# Altium PCB PCB.PcbDoc
Units mil, origin at the board's own origin, x right, y up, seen from the top; angles counter-clockwise.
Board outline 2700 x 2100 mil, 2 copper layers (Top Layer, Bottom Layer); 40 components, 50 nets, 179 pads, 62 vias.
Unrouted connection lines stored in the file: 1.
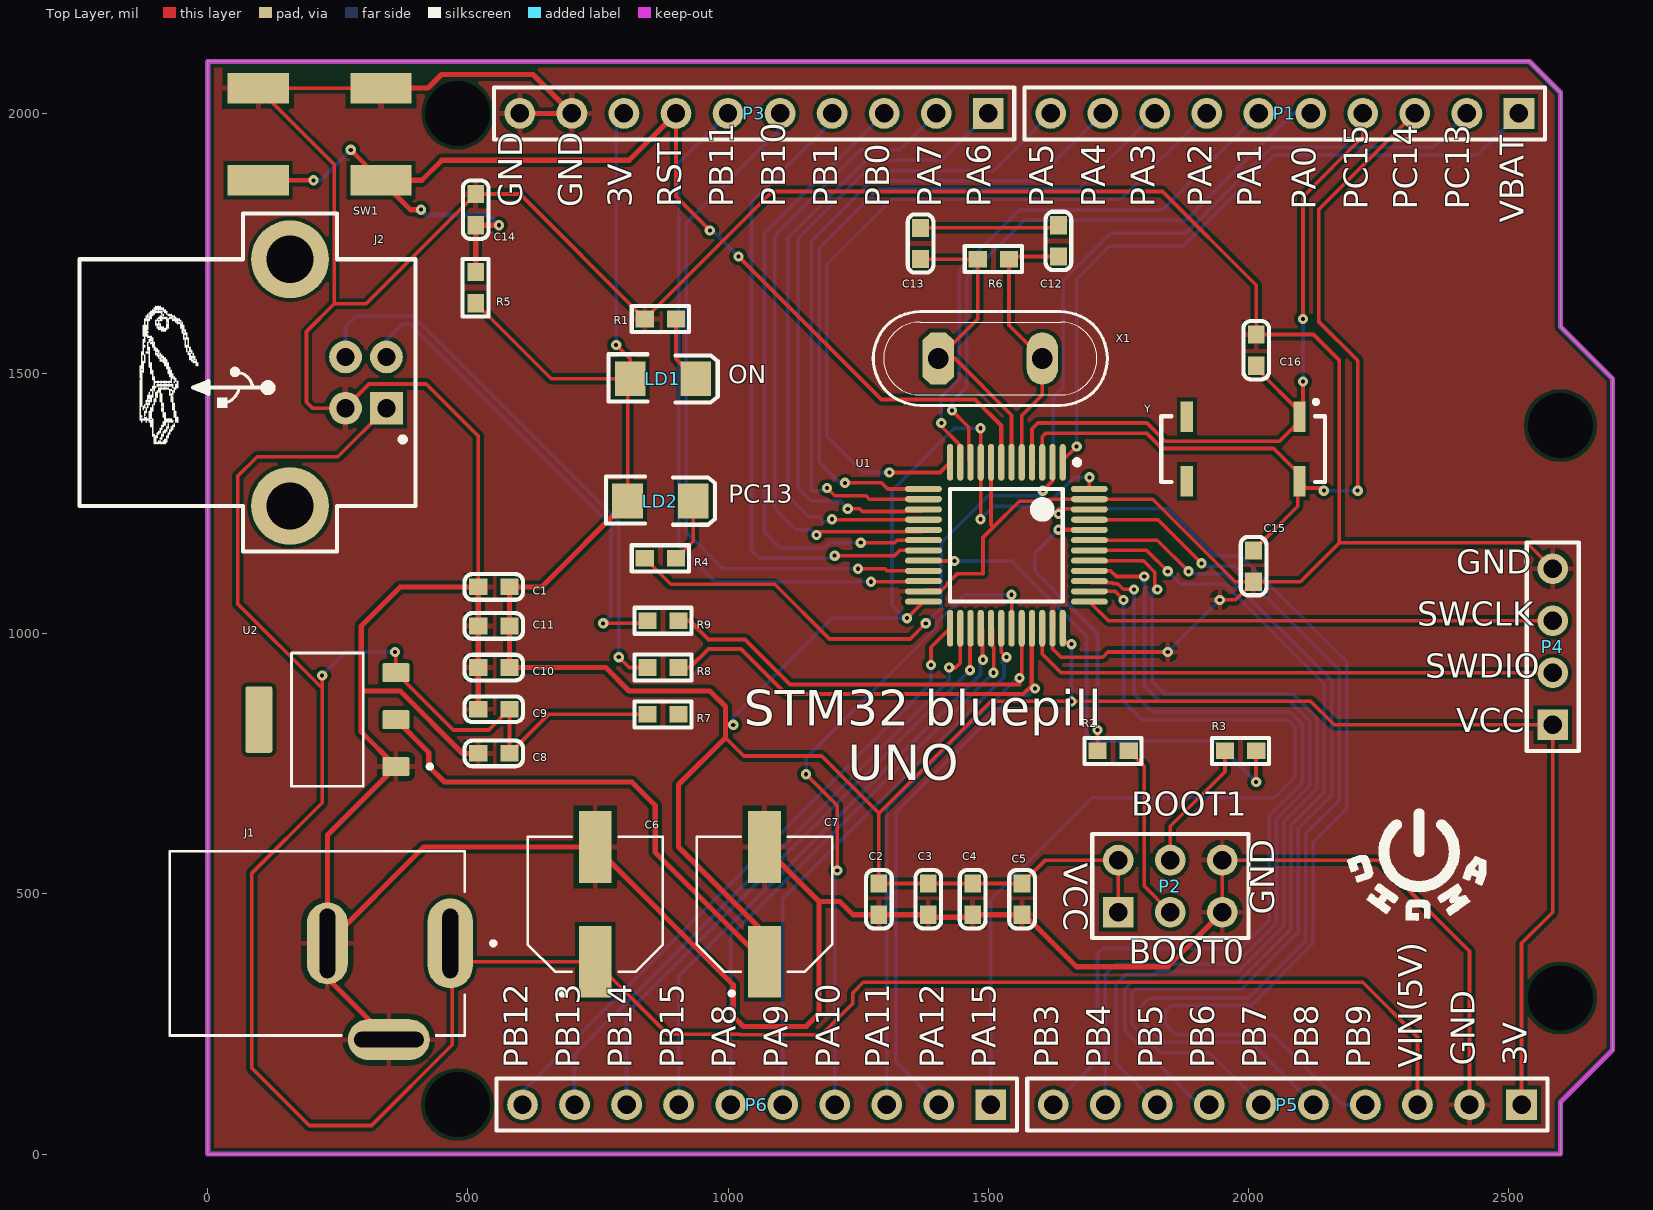
[diagram p0: Top Layer view]
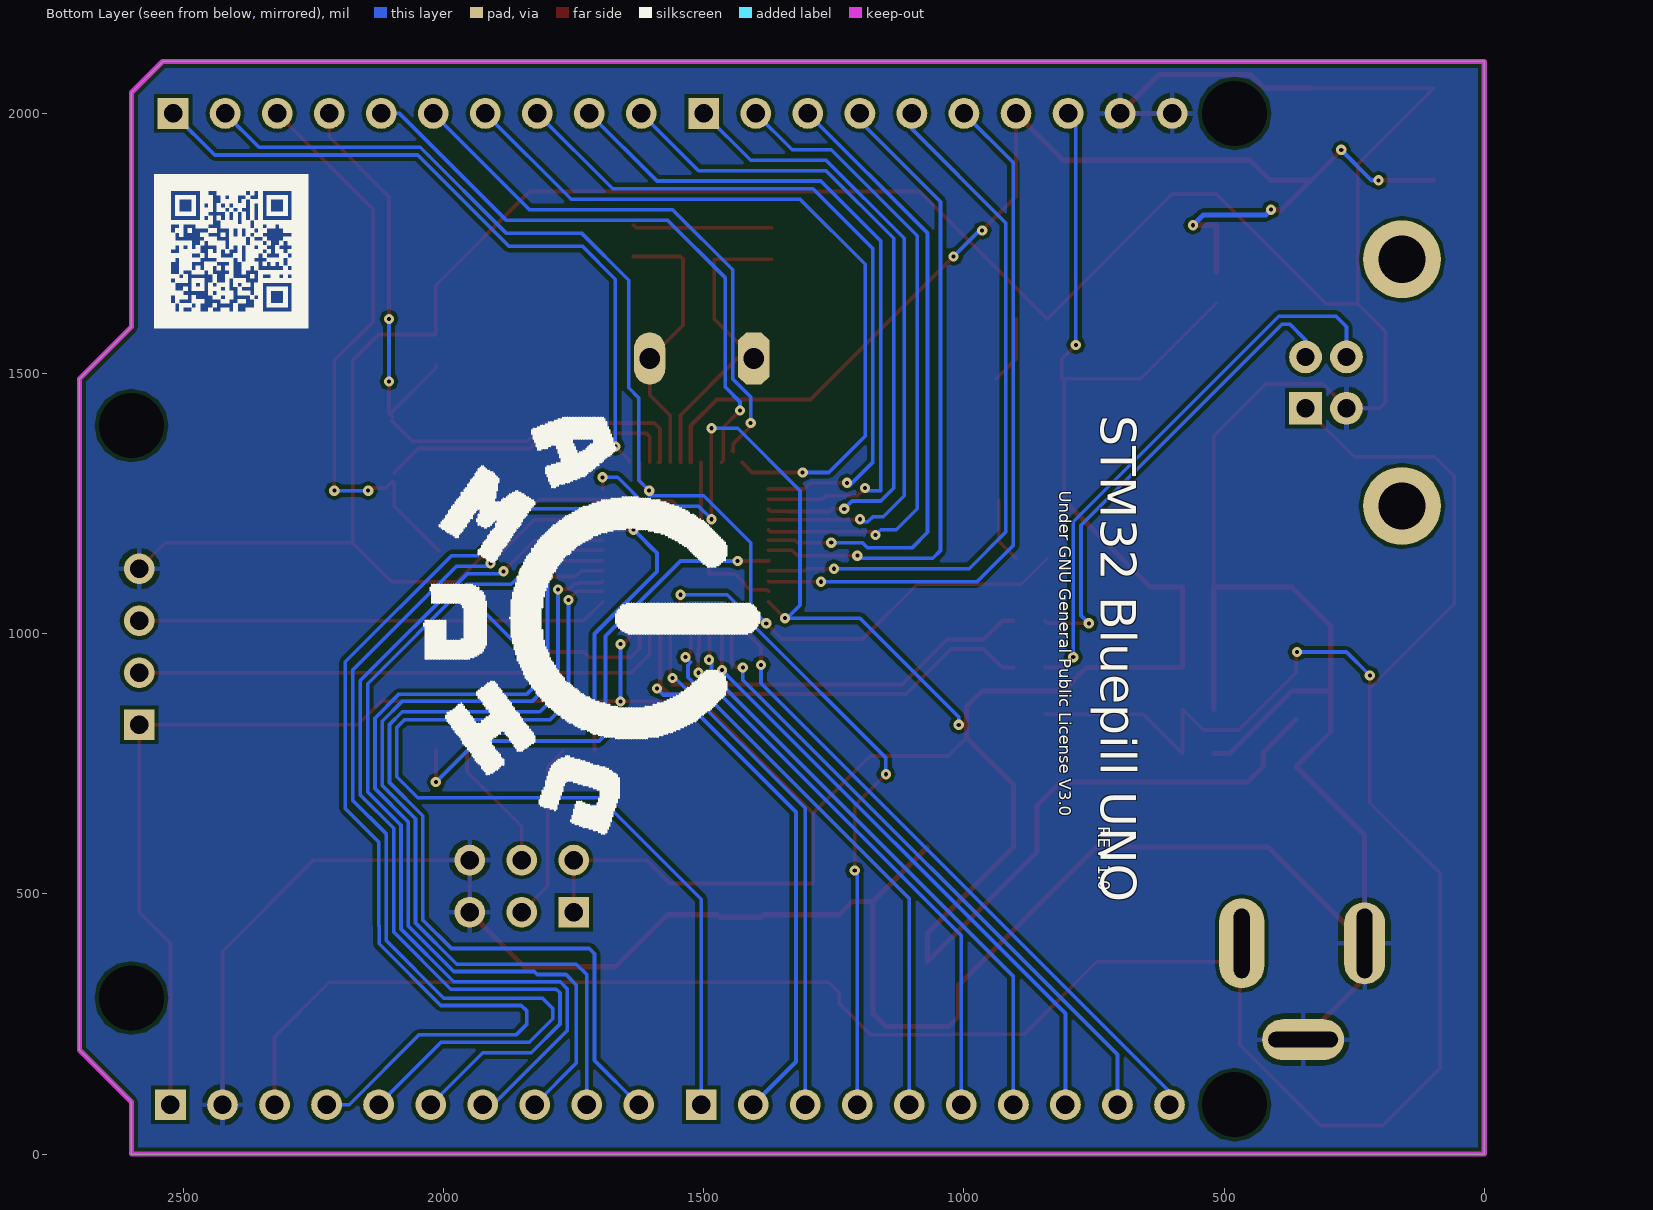
[diagram p1: Bottom Layer view, seen from below]
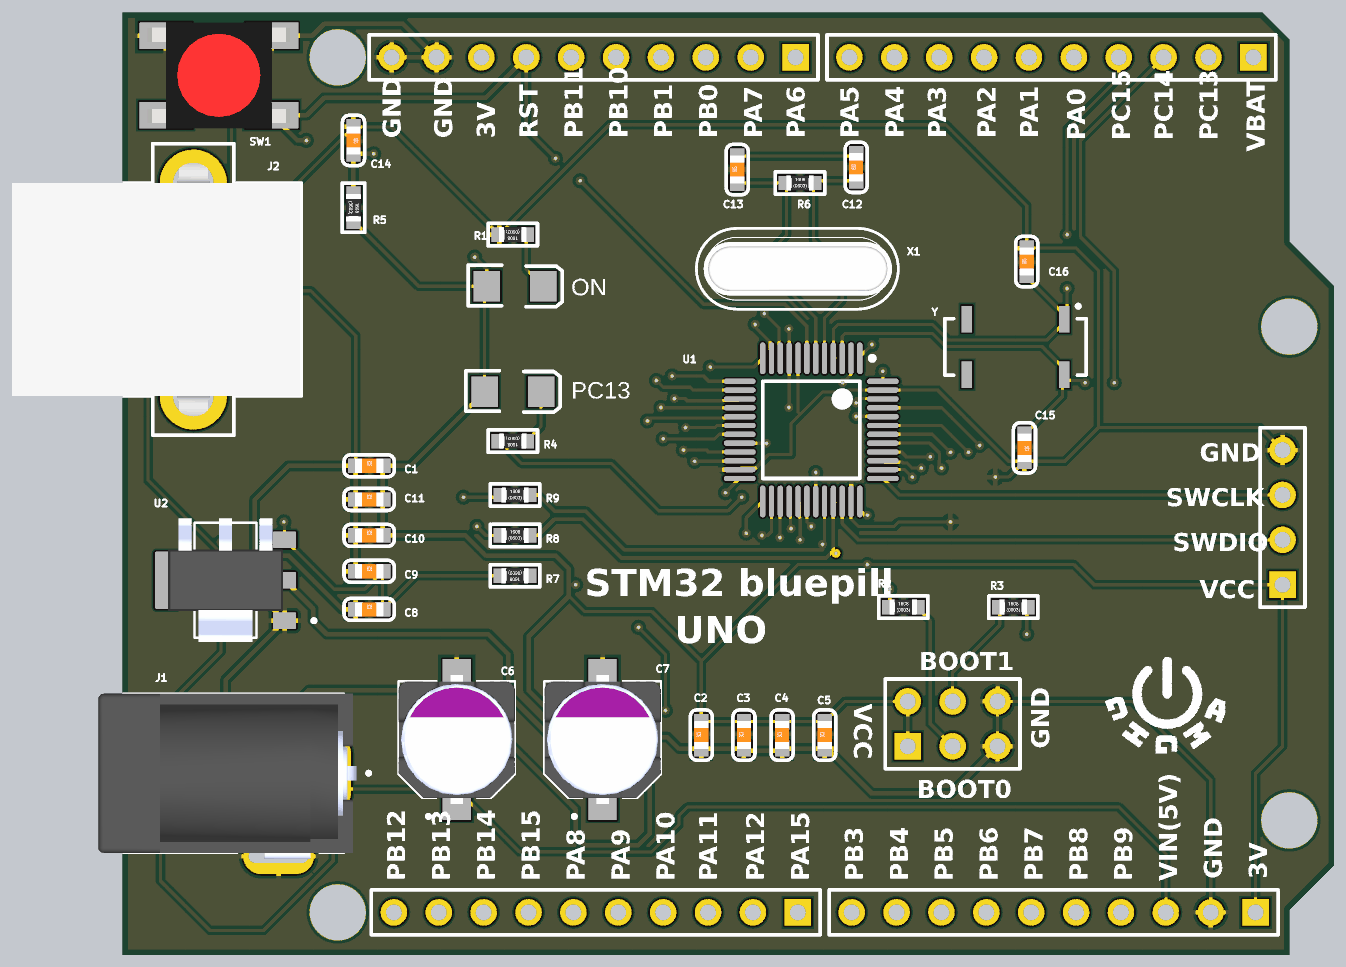
[diagram p2: 3D render of the assembled board from above, using the file's embedded part models]

## Layer stack, top to bottom
Top Solder: solder mask 0.4, Solder Resist, Dk 3.5
Top Layer: signal copper 1.4
Dielectric 1: dielectric 12.6, FR-4, Dk 4.8
Bottom Layer: signal copper 1.4
Bottom Solder: solder mask 0.4, Solder Resist, Dk 3.5

## Board outline
0,0 0,2100 2540,2100 2600,2040 2600,1590 2700,1490 2700,200 2600,100 2600,0

## Design rules (kind name [scope] priority, off if disabled: settings)
Clearance [All] p1: gap=7
DiffPairsRouting [All] p1: maxlimit=10 minlimit=10 mostfreqgap=10 toplayer_minwidth=8 toplayer_maxwidth=15 toplayer_prefwidth=15 bottomlayer_minwidth=8 bottomlayer_maxwidth=15 bottomlayer_prefwidth=15 maxuncoupledlength=500
PolygonConnect [All] p1: connectstyle=Relief reliefconductorwidth=10 reliefentries=4 polygonreliefangle="90 Angle" airgapwidth=10
RoutingVias [All] p1: holewidth=7.87 width=19.68 viastyle="Through Hole" minholewidth=7.87 minwidth=19.68 maxholewidth=7.87 maxwidth=19.68
SolderMaskExpansion [All] p1: expansion=4
UnpouredPolygon [All] p1: allowunpoured=FALSE
Width [All] p1: maxlimit=10 minlimit=7 preferedwidth=7
28 further rules are at their usual default settings.

## Classes and differential pairs
differential pair USB: +USB_P -USB_N

## Components (designator, comment, footprint, x,y, rotation, side; value= is the part's Value field where it differs from the comment)
C1 "Capacitor SMD" "0603 Capacitor" 550,1090 r0 top
C2 "Capacitor SMD" "0603 Capacitor" 1290,490 r90 top
C3 "Capacitor SMD" "0603 Capacitor" 1385,490 r90 top
C4 "Capacitor SMD" "0603 Capacitor" 1470,490 r90 top
C5 "Capacitor SMD" "0603 Capacitor" 1565,490 r90 top
C6 "100uF" CAP_50SVF10M 745,480 r90 top
C7 "100uF" CAP_50SVF10M 1070,480 r90 top
C8 "Capacitor SMD" "0603 Capacitor" 550,770 r0 top
C9 "Capacitor SMD" "0603 Capacitor" 550,855 r0 top
C10 "Capacitor SMD" "0603 Capacitor" 550,935 r0 top
C11 "Capacitor SMD" "0603 Capacitor" 550,1015 r0 top
C12 "Capacitor SMD" "0603 Capacitor" 1635,1755 r90 top
C13 "Capacitor SMD" "0603 Capacitor" 1370,1750 r90 top
C14 "Capacitor SMD" "0603 Capacitor" 515,1815 r270 top
C15 "Capacitor SMD" "0603 Capacitor" 2010,1130 r270 top
C16 "Capacitor SMD" "0603 Capacitor" 2015,1545 r90 top
J1 "DC-005-5A-2.0" XKB_DC-005-5A-2.0 230,405 r0 top
J2 "USBB" USB 90,1470 r90 top
LD1 "SMD LED" "LED_1206 RED" 875,1490 r0 top
LD2 "SMD LED" "LED_1206 RED" 870,1255 r0 top
P1 "Header 10" HDR1X10 2520,2000 r180 top
P2 "Header 3X2" HDR2X3 1750,465 r0 top
P3 "Header 10" HDR1X10 1500,2000 r180 top
P4 "Header 4" HDR1X4 2585,825 r90 top
P5 "Header 10" HDR1X10 2525,95 r180 top
P6 "Header 10" HDR1X10 1505,95 r180 top
R1 "Resistor SMD" "0603 Resistor" 870,1605 r180 top
R2 "Resistor SMD" "0603 Resistor" 1740,775 r0 top
R3 "Resistor SMD" "0603 Resistor" 1985,775 r0 top
R4 "Resistor SMD" "0603 Resistor" 870,1145 r180 top
R5 "Resistor SMD" "0603 Resistor" 515,1665 r270 top
R6 "Resistor SMD" "0603 Resistor" 1510,1720 r0 top
R7 "Resistor SMD" "0603 Resistor" 875,845 r180 top
R8 "Resistor SMD" "0603 Resistor" 875,935 r0 top
R9 "Resistor SMD" "0603 Resistor" 875,1025 r0 top
SW1 "LTL613" LTL613 215,1960 r180 top
U1 "STM32F103C8T6" LQFP48_N 1535,1170 r270 top
U2 "AMS1117-3.3" SOT229P700X180-4N 230,835 r180 top
X1 "8MHz" Xtal 1510,1520 r0 top
Y "32.7680K" OSCL550P800X320X254-4N 1990,1355 r270 top

## Footprints (in the part's own frame and the unit in brackets; to place one, negate y for a bottom-side part, rotate by r counter-clockwise, add the part's x,y. Pads: shape width x height; smd on the part's side, far side on the other; paste and mask are expansions set on the pad)
"0603 Capacitor" [mil]
  rect 35x32 smd: 1(-29.99,0.01) 2(30.01,0.01)
  silkscreen extent -56,-25 56,25, body extent -31,-16 32,16, height 12
"0603 Resistor" [mil]
  rect 35x32 smd: 1(-30,0) 2(30,0)
  silkscreen extent -55,-25 55,25, body extent -31,-17 31,17, height 18
CAP_50SVF10M [mm]
  rect 3.5x1.6 smd: 1(-2.8,0) 2(2.8,0)
  silkscreen extent -4.45,-3.3 3.3,3.3, body extent -3.65,-3.3 3.65,3.3, height 5.9
HDR1X4 [mm] "Connector; Header; 4 Position"
  rect 1.5x1.5 hole 0.9: 1(0,0)
  round 1.5 hole 0.9: 2(2.54,0) 3(5.08,0) 4(7.62,0)
  silkscreen extent -1.27,-1.27 8.89,1.27
HDR1X10 [mm] "Connector; Header; 10 Position"
  rect 1.5x1.5 hole 0.9: 1(0,0)
  round 1.5 hole 0.9: 2(2.54,0) 3(5.08,0) 4(7.62,0) 5(10.16,0) 6(12.7,0) 7(15.24,0) 8(17.78,0) 9(20.32,0) 10(22.86,0)
  silkscreen extent -1.27,-1.27 24.13,1.27
HDR2X3 [mm] "Connector; Header; 3x2 Position"
  rect 1.5x1.5 hole 0.9: 1(0,0)
  round 1.5 hole 0.9: 2(0,2.54) 3(2.54,0) 4(2.54,2.54) 5(5.08,0) 6(5.08,2.54)
  silkscreen extent -1.27,-1.27 6.35,3.81
"LED_1206 RED" [mm]
  rect 1.5x1.7 smd: 1(-1.6,0) 2(1.6,0)
  silkscreen extent -2.65,-1.15 2.67,1.2, body extent -1.6,-0.8 1.6,0.8, height 1.11
LQFP48_N [mm] "Thin QFP, 48-Leads, Body 7x7mm, Pitch 0.5mm, IPC Medium Density"
  oval 1.8x0.3 smd: 1(-4.05,2.75) 2(-4.05,2.25) 3(-4.05,1.75) 4(-4.05,1.25) 5(-4.05,0.75) 6(-4.05,0.25) 7(-4.05,-0.25) 8(-4.05,-0.75) 9(-4.05,-1.25) 10(-4.05,-1.75) 11(-4.05,-2.25) 12(-4.05,-2.75) 25(4.05,-2.75) 26(4.05,-2.25) 27(4.05,-1.75) 28(4.05,-1.25) 29(4.05,-0.75) 30(4.05,-0.25) 31(4.05,0.25) 32(4.05,0.75) 33(4.05,1.25) 34(4.05,1.75) 35(4.05,2.25) 36(4.05,2.75)
  oval 0.3x1.8 smd: 13(-2.75,-4.05) 14(-2.25,-4.05) 15(-1.75,-4.05) 16(-1.25,-4.05) 17(-0.75,-4.05) 18(-0.25,-4.05) 19(0.25,-4.05) 20(0.75,-4.05) 21(1.25,-4.05) 22(1.75,-4.05) 23(2.25,-4.05) 24(2.75,-4.05) 37(2.75,4.05) 38(2.25,4.05) 39(1.75,4.05) 40(1.25,4.05) 41(0.75,4.05) 42(0.25,4.05) 43(-0.25,4.05) 44(-0.75,4.05) 45(-1.25,4.05) 46(-1.75,4.05) 47(-2.25,4.05) 48(-2.75,4.05)
  silkscreen extent -4.17,-2.75 2.75,3.58, body extent -3.5,-3.5 3.5,3.5, height 1.6
LTL613 [mm]
  rect 3x1.5 smd: 0(-3,-2.25) 0(3,-2.25) 1(-3,2.25) 1(3,2.25)
  body extent -4.04,-3 4.04,3, height 5
OSCL550P800X320X254-4N [mm]
  rect 1.5x0.6 smd: 1(-1.575,2.75) 2(-1.575,-2.75) 3(1.575,-2.75) 4(1.575,2.75)
  silkscreen extent -2.4,-4 1.6,4
SOT229P700X180-4N [mm]
  rrect15% 1.31x0.93 smd: 1(-3.345,2.29) 2(-3.345,0) 3(-3.345,-2.29)
  rrect15% 1.31x3.24 smd: 4(3.345,0)
  silkscreen extent -5.1,-3.25 1.75,3.25, body extent -3.25,-3.5 3.25,3.5, height 1.8
USB [mm]
  rect 1.6x1.6 hole 0.9: 1(-0.928,-6.442)
  round 1.6 hole 0.9: 2(1.572,-6.442) 3(1.572,-4.442) 4(-0.928,-4.442)
  round 3.8 hole 2.3: 5(-5.698,-1.732) 6(6.342,-1.732)
  silkscreen extent -7.92,-7.85 8.58,8.55, body extent -7.83,-6.88 7.07,7.84, height 8.15
XKB_DC-005-5A-2.0 [mm]
  oval 2.2x4.4 hole 0.762 slot 3.4 at 90 deg: 1(6,0)
  oval 2x4 hole 0.762 slot 3.4 at 90 deg: 2(0,0)
  oval 4x2 hole 0.762 slot 3.4 at 0 deg: 3(3,-4.7)
  silkscreen extent -7.7,-4.5 8.2,4.5, body extent -7.2,-4.85 7.4,4.5, height 11
Xtal [mil]
  oct 60x100 hole 40: 1(-106,9)
  oval 60x100 hole 40: 2(94,9)
  silkscreen extent -231,-81 219,99, body extent -215,-51 205,69, height 161

## Part data
C6 C7: library part 50SVF10M, "10F 50V Aluminum - Polymer Capacitors Radial, Can - SMD 40mOhm 1000 Hrs @ 125C"
J1: "DC Power Receptacle Jack, Through Hole，Right Angle"
J2: "USB 1.1, Right Angle, Thru-Hole, Reverse Type, Receptacle, 4 Position, Black"
LD1 LD2: library part "LED SMD"
P1 P3 P5 P6: "Header, 10-Pin"
P2: "Header, 3-Pin, Dual row"
P4: "Header, 4-Pin"
SW1: library part Button_tact, "Tact button switch"
U1: "STM32 ARM-based 32-bit MCU Performance Line with 64 kB Flash, 20 kB Internal RAM, -40 to +85°C Temperature, 48-Pin LQFP, Tray"
U2: "Sot223/Pkg 1-Amp 3.3-Volt Low Drop Out Voltage Regulatator"
X1: library part Crystal
Y: library part MC-306_32.7680K-A5:_ROHS, "32.768kHz ±100ppm Crystal 12.5pF 50 kOhms 4-SOJ, 5.50mm pitch"

## Free pads (board coordinates)
  round 0 hole 125: 0(480,95) 0(480,2000) 0(2600,300) 0(2600,1400)

## Via types
v1: diameter 19.68, hole 7.87, Top Layer to Bottom Layer, tented both sides, 61 vias
v2: diameter 19.68, hole 7.87, Top Layer to Bottom Layer, 1 vias

## Nets (pads, with @x,y where several pads share a name; then routed paths per layer and width w, separated by ;. In a path a pad name is that pad's centre, name@x,y a point inside that pad or via, vN(x,y) a via of type N, cw(c..) or ccw(c..) an arc to the next point about the centre after c; other vN are vias at no path point)
5V: C6.1 C8.2 C9.2 J1.1 J2.1 P5.3 R7.2 U2.3 | length 5331.1
  Top Layer w7: v1(220,920) 220,895 ; J2.1 250.16,1340 95,1340 57.5,1302.5 57.5,1057.5 220,895 ; v1(360,965) 361.69,963.31 U2.3 471.85,815 540,815 C9.2 C8.2 655,845 R7.2 ; J1.1 501.46,369.76 C6.1 884.76,230 1023.08,230 1023.58,229.5 1179.5,229.5 1240,290 1240,310 1260,330 2220,330 2325,225 P5.3 ; J1.1@470,369.76 470,210 315,55 195,55 85,165 85,540 220,675 220,895
  Top Layer w10: J1.1@470,369.76 J1.1@501.46,369.76
  Bottom Layer w7: v1(220,920) 265,965 v1(360,965)
BOOT0: R2.1 U1.44 | length 553
  Top Layer w8: v1(1635,1200) 1693.98,1200 U1.44 ; R2.1 v1(1710,815)
  Bottom Layer w8: v1(1635,1200) 1623.75,1188.75 1601.25,1166.25 1590,1155 1590,1120 1710,1000 v1(1710,815)
BOOT1: R3.2 U1.20 | length 986.7
  Top Layer w8: U1.20 1376.02,1140 v1(1435,1140) ; v1(2015,715) R3.2
  Bottom Layer w8: v1(1435,1140) 1545,1140 1689.16,995.84 1689.16,806.37 1701.37,794.16 1935.84,794.16 v1(2015,715)
GND: C1.1 C2.1 C3.1 C4.1 C5.1 C6.2 C7.2 C8.1 C9.1 C10.1 C11.1 C14.1 C15.2 C16.2 J1.2 J1.3 J2.4 P2.5 P2.6 P3.9 P3.10 P4.4 P5.2 R1.2 SW1.0 U1.8 U1.23 U1.35 U1.47 U2.1 | length 12021.7
  Top Layer w7: SW1.0@333.11,2048.58 96.89,2048.58 243.48,1901.99 243.48,1634.37 ; C1.1 520.01,1379.99 420,1480 310,1480 264.87,1434.87 J2.4 201.55,1433.45 190,1445 190,1580.89 243.48,1634.37 ; U1.23 1378.83,1084.7 1411.87,1084.7 1421.48,1094.31 1421.48,1096.48 1440,1115 1490,1115 1490,1185 1510,1205 ; U1.8 1505.47,1209.53 1510,1205 ; U1.35 1623.58,971.42 1640,955 1720,955 1730,965 v1(1845,965) ; v1(1945,1065) 1975.01,1065 C15.2 ; P2.5 P2.6 2250,565 2425,390 P5.2 ; P4.4 2535,1175 2175,1175 ; 243.48,1634.37 304.38,1634.37 C14.1 600.01,1844.99 R1.2 1085,1850 1835,1850 2014.99,1670.01 C16.2 2124.99,1575.01 2175,1525 2175,1175 ; 1510,1205 1559.66,1254.66 1613.43,1254.66 1617.35,1258.58 U1.47 1816.42,1258.58 1975.01,1099.99 C15.2 ; C15.2 2099.99,1099.99 2175,1175
  Top Layer w10: SW1.0@333.11,2048.58 423.22,2048.58 449.14,2074.5 625.5,2074.5 P3.9 P3.10 ; J1.3 230,338.07 J1.2 ; C8.1 489.99,770.01 370,890 295,890 ; C9.1 C10.1 C11.1 C1.1 370.01,1090.01 295,1015 295,890 ; C7.2 1175,485.24 ; P2.5 1845,360 1670,360 1570,460 1475,460 1470,455 1390,455 C3.1 1240,460 1214.76,485.24 1175,485.24 ; J1.2 230,613.15 U2.1 295,811.54 295,890 ; J1.2 415.24,590.24 C6.2 1010,325.24 1010,265 1030,245 1150,245 1175,270 1175,485.24
  Bottom Layer w7: v1(1845,965) v1(1945,1065)
NetC12_2: C12.2 C13.2 | length 267.1
  Top Layer w7: C13.2 1629.99,1780.01 C12.2
NetJ2_2: J2.2 R9.1 | length 918.6
  Top Layer w7: v1(760,1020) 840,1020 R9.1
  Bottom Layer w7: J2.2 343.61,1564.61 374.1,1595.1 388.3,1595.1 775,1208.4 775,1035 v1(760,1020)
NetJ2_3: J2.3 R8.1 | length 1078.4
  Top Layer w7: v1(790,955) 810,935 R8.1
  Bottom Layer w7: J2.3 264.87,1589.87 285,1610 395,1610 790,1215 v1(790,955)
NetLD1_2: LD1.2 R1.1 | length 130.7
  Top Layer w7: R1.1 900,1528 LD1.2
NetLD2_2: LD2.2 R4.1 | length 123.7
  Top Layer w7: R4.1 933,1178 LD2.2
NetP2_3: P2.3 R2.2 | length 343.1
  Top Layer w7: R2.2 1800,745 1800,515 P2.3
NetP2_4: P2.4 R3.1 | length 253.5
  Top Layer w7: P2.4 1850,630 1955,735 R3.1
OSCIN: C12.1 R6.2 U1.5 X1.2 | length 530.5
  Top Layer w7: U1.5 1564.53,1419.53 1604,1459 X1.2 1540,1593 R6.2 1545.01,1725.01 C12.1
OSCOUT: C13.1 R6.1 U1.6 X1.1 | length 609.1
  Top Layer w7: C13.1 R6.1 1480,1605 X1.1 1436,1529 1544.84,1420.16 U1.6
PA0: P1.5 U1.10 | length 1173.1
  Top Layer w7: v1(1430.34,1429.16) 1462.82,1396.68 1462.82,1332.73 U1.10
  Bottom Layer w7: v1(1430.34,1429.16) 1430.34,1445.34 1458.5,1473.5 1458.5,1683.5 1570,1795 1880,1795 2085,2000 P1.5
PA1: P1.6 U1.11 | length 1079
  Top Layer w7: v1(1410,1405) 1410,1398.91 1443.14,1365.77 1443.14,1353.72 1445,1351.86 U1.11@1443.14,1350
  Bottom Layer w7: v1(1410,1405) 1410,1455.15 1444.5,1489.65 1444.5,1699.5 1560,1815 1835,1815 P1.6
PA2: P1.7 U1.12 | length 1453.9
  Top Layer w7: v1(1310,1310) 1407.28,1310 U1.12
  Bottom Layer w7: v1(1310,1310) 1260,1310 1190,1380 1190,1710 1315,1835 1755,1835 P1.7
PA3: P1.8 U1.13 | length 1388.8
  Top Layer w7: v1(1225,1290) 1295,1290 1306.73,1278.27 U1.13
  Bottom Layer w7: v1(1225,1290) 1220,1285 1175,1330 1175,1740 1290,1855 1675,1855 P1.8
PA4: P1.9 U1.14 | length 1368
  Top Layer w7: v1(1190,1280) 1205,1265 1265,1265 1271.42,1258.58 U1.14
  Bottom Layer w7: v1(1190,1280) 1185,1275 1160,1275 1160,1755 1275,1870 1590,1870 P1.9
PA5: P1.10 U1.15 | length 1325.6
  Top Layer w7: v1(1230,1240) 1253.21,1240 1258.21,1235 1338.61,1235 1338.61,1235.62 1372.27,1235.62 U1.15
  Bottom Layer w7: v1(1230,1240) 1215,1255 1160,1255 1135,1280 1135,1760 1265,1890 1510,1890 P1.10
PA6: P3.1 U1.16 | length 1263.1
  Top Layer w7: v1(1200,1220) 1200.79,1219.21 U1.16
  Bottom Layer w7: v1(1200,1220) 1195,1215 1185,1215 1175,1225 1155,1225 1115,1265 1115,1760 1265,1910 1410,1910 P3.1
PA7: P3.2 U1.17 | length 1242.5
  Top Layer w7: v1(1170,1190) 1176.25,1196.25 1372.27,1196.25 U1.17
  Bottom Layer w7: v1(1170,1190) 1160,1200 1130,1200 1090,1240 1090,1765 1255,1930 1330,1930 P3.2
PA8: P6.6 U1.29 | length 1126.9
  Top Layer w7: U1.29 1508.75,1007.27 1508.75,974.23 1510.34,972.64 1510.34,925.34 v1(1510,925)
  Bottom Layer w7: P6.6 1005,420 v1(1510,925)
PA9: P6.5 U1.30 | length 1102.2
  Top Layer w7: U1.30 1525.16,964.84 v1(1535,955)
  Bottom Layer w7: P6.5 1105,491.23 1530.34,916.57 1530.34,939.66 1525,945 v1(1535,955)
PA10: P6.4 U1.31 | length 1287.8
  Top Layer w7: v1(1150,730) 1210,670 v1(1210,545) ; U1.31 1545,1010.71 v1(1545,1075)
  Bottom Layer w7: v1(1150,730) 1150,761.23 1400.34,1011.57 1400.34,1020.34 1455,1075 v1(1545,1075) ; P6.4 1205,540 v1(1210,545)
PA15: P6.1 U1.38 | length 1790.4
  Top Layer w7: U1.38 1743.58,1081.42 v1(1760,1065)
  Bottom Layer w7: P6.1 1505,490 1700,685 2050,685 2090,725 2090,820 2075,835 1795,835 1760,870 v1(1760,1065)
PB0: P3.3 U1.18 | length 1224.4
  Top Layer w7: v1(1255,1175) 1320,1175 1324.84,1179.84 U1.18
  Bottom Layer w7: v1(1255,1175) 1195,1175 1185,1165 1100,1165 1070,1195 1070,1770 P3.3
PB1: P3.4 U1.19 | length 1247.2
  Top Layer w7: v1(1205,1150) 1320,1150 1330.16,1160.16 U1.19
  Bottom Layer w7: P3.4 1200,1985 1045,1830 1045,1160 1060,1145 1200,1145 v1(1205,1150)
PB3: P5.10 U1.39 | length 1725.2
  Top Layer w7: U1.39 1697.73,1097.82 1738.95,1097.82 1740.78,1096 1748.8,1096 1759.46,1085.34 1779.66,1085.34 v1(1780,1085)
  Bottom Layer w7: P5.10 1710,180 1710,385 1720,395 1985,395 2040,450 2040,650 2104,714 2104,825.8 2079.8,850 1815,850 1780.34,884.66 1780.34,1073.77 1780,1074.11 v1(1780,1085)
PB4: P5.9 U1.40 | length 1700.6
  Top Layer w7: U1.40 1735.79,1120.79 1746.57,1110 v1(1800,1110)
  Bottom Layer w7: P5.9 1725,345 1745,365 1974.8,365 2054,444.2 2054,644.2 2118,708.2 2118,832 2080,870 1830,870 1800.34,899.66 1800.34,1108.77 1800,1109.11 v1(1800,1110)
PB5: P5.8 U1.41 | length 1769.2
  Top Layer w7: U1.41 1798.3,1140.47 1820.34,1118.43 1820.34,1101.57 1820,1101.23 1820,1085 v1(1825,1085)
  Bottom Layer w7: P5.8 1745,175 1745,325 1765,345 1820,345 1826,351 1980.6,351 2068,438.4 2068,638.4 2132,702.4 2132,837.8 2085.8,884 1840,884 1815,909 1815,1085 1820,1090 v1(1825,1085)
PB6: P5.7 U1.42 | length 1724.3
  Top Layer w7: U1.42 1804.84,1160.16 v1(1845,1120)
  Bottom Layer w7: v1(1845,1120) 1870,1095 1955,1095 2146,904 2146,696 2082,632 2082,432.6 1980.4,331 1776,331 1762.4,317.4 1762.4,237.6 1905,95 P5.7
PB7: P5.6 U1.43 | length 1830.7
  Top Layer w7: U1.43 1825.16,1179.84 v1(1885,1120)
  Bottom Layer w7: v1(1885,1120) 1885,1115 1955,1115 2160,910 2160,690.2 2096,626.2 2096,426.8 1986.2,317 1783.4,317 1776.4,310 1776.4,250 1831.4,195 1925,195 P5.6
PB8: P5.5 U1.45 | length 1943.9
  Top Layer w7: U1.45 1826.13,1219.21 v1(1910,1135.34)
  Bottom Layer w7: v1(1910,1135.34) 1910,1135 1915,1130 1975,1130 2175,930 2175,680 2110,615 2110,410 1999.6,299.6 1810,299.6 1790.4,280 1790.4,260 1835.4,215 2005,215 P5.5
PB9: P5.4 U1.46 | length 2136.1
  Top Layer w7: v1(1635,1230) 1635,1240 1693.35,1240 U1.46
  Bottom Layer w7: v1(1635,1230) 1635,1240 1845,1240 1935,1150 1985,1150 2189,946 2189,664 2125,600 2125,440 2124,439 2124,404.2 2005.4,285.6 1850.6,285.6 1840,275 1840,250 1861,229 2047.61,229 2181.61,95 P5.4
PB10: P3.5 U1.21 | length 1365.8
  Top Layer w7: v1(1250,1125) 1301.57,1125 1305.79,1120.79 U1.21
  Bottom Layer w7: P3.5 1100,1970 920,1790 920,1195 990,1125 v1(1250,1125)
PB11: P3.6 U1.22 | length 1369.4
  Top Layer w7: v1(1275,1100) 1374.45,1100 U1.22
  Bottom Layer w7: P3.6 905,1905 905,1170 975,1100 v1(1275,1100)
PB12: P6.10 U1.25 | length 1255.9
  Top Layer w7: v1(1390,940) 1390,973.82 U1.25
  Bottom Layer w7: P6.10 605,120 1390,905 v1(1390,940)
PB13: P6.9 U1.26 | length 1230.2
  Top Layer w7: v1(1425,935) 1437.83,935 1446.42,943.58 U1.26
  Bottom Layer w7: P6.9 705,191.23 1425,911.23 v1(1425,935)
PB14: P6.8 U1.27 | length 1189.4
  Top Layer w7: v1(1465,930) 1465,1009.45 U1.27
  Bottom Layer w7: P6.8 805,270 v1(1465,930)
PB15: P6.7 U1.28 | length 1159.9
  Top Layer w7: U1.28 1489.07,1007.27 1489.07,950.93 v1(1490,950)
  Bottom Layer w7: P6.7 905,341.23 1485.34,921.57 1485.34,944.38 1485,944.73 1485,945 v1(1490,950)
PC13: P1.2 R4.2 U1.2 | length 2407.6
  Top Layer w7: R4.2 890,1095 1090,1095 1195,990 1350,990 v1(1380,1020) ; v1(1605,1275) 1623.58,1293.58 U1.2
  Bottom Layer w7: v1(1380,1020) 1410,1050 1410,1175 1500,1265 1605,1265 ; v1(1605,1275) 1625,1295 1625,1453.22 1644.5,1472.72 1644.5,1679.5 1735,1770 1880,1770 2045,1935 2355,1935 P1.2
PC14: C15.1 P1.3 U1.3 Y.4 | length 1691.2
  Top Layer w7: U1.3 1603.9,1378.9 1610,1385 1805.2,1385 1834.2,1356 2049,1356 Y.4@2095,1310 ; C15.1 2095,1244.99 Y.4@2095,1290 ; Y.4 2111.26,1280 2140,1280 v1(2145,1275) ; v1(2210,1275) 2210,1525 2135,1600 2135,1815 P1.3
  Bottom Layer w7: v1(2145,1275) v1(2210,1275)
PC15: C16.1 P1.4 U1.4 Y.1 | length 1378
  Top Layer w7: U1.4@1587.49,1329.45 U1.4 1584.21,1394.21 1595,1405 1805,1405 1840,1370 2060,1370 Y.1@2100,1410 ; C16.1 2014.99,1510.01 Y.1@2100,1425 ; Y.1 2105,1423.74 v1(2105,1485) ; v1(2105,1605) 2105,1840 2220,1955 P1.4
  Bottom Layer w7: v1(2105,1485) v1(2105,1605)
RESET: C14.2 P3.7 R5.1 SW1.1 U1.7 | length 2340.7
  Top Layer w8: SW1.1@96.89,1871.42 v1(203.58,1871.42) ; v1(275,1930) 275,1929.53 SW1.1@333.11,1871.42 ; P3.7 900,1840 v1(965,1775) ; v1(1020,1725) 1295,1450 1475,1450 1525.16,1399.84 U1.7
  Top Layer w10: v1(410,1815) 389.53,1815 333.11,1871.42 411.42,1871.42 450,1910 810,1910 P3.7 ; R5.1 C14.2 v1(560,1785)
  Bottom Layer w8: v1(203.58,1871.42) 216.42,1871.42 v1(275,1930) ; v1(965,1775) 970,1775 v1(1020,1725)
  Bottom Layer w10: v1(410,1815) 420,1805 540,1805 v1(560,1785)
SWCLK: P4.3 U1.37 | length 905.8
  Top Layer w7: U1.37 1731.18,1025 P4.3
SWDIO: P4.2 U1.34 | length 1045.5
  Top Layer w7: U1.34 1603.9,961.1 1640,925 P4.2
USB_N: P6.3 R9.2 U1.32 | length 1746.1
  Top Layer w7: v1(1560,915) 1564.06,915 1564.53,914.53 U1.32
  Top Layer w8: R9.2 926.5,1025 962.5,989 1032.46,989 1118.96,902.5 1560,902.5 v1(1560,915)
  Bottom Layer w7: P6.3 1305,665 v1@1557.5,917.5
USB_P: P6.2 R7.1 R8.2 U1.33 | length 1821.4
  Top Layer w8: R8.2 926.5,935 962.5,971 1025,971 1111.5,884.5 1567.46,884.5 v2@1583.84,900.89 ; U1.33@1586.99,1007.77 U1.33 1583.84,1010.18 v2@1583.84,900.89 ; v2(1590,895) 1589.73,895 v2@1583.84,900.89
  Bottom Layer w8: P6.2 1322.5,177.5 1322.5,657.75 1522.37,857.63 1547.37,882.63 1577.63,882.63 v2(1590,895)
VBAT: P1.1 U1.1 | length 1345.1
  Top Layer w7: U1.1 1643.27,1333.27 v1(1670,1360)
  Bottom Layer w7: v1(1670,1360) 1670,1681.5 1733.5,1745 1875,1745 2050,1920 2440,1920 P1.1
VCC3V3: C1.2 C2.2 C3.2 C4.2 C5.2 C7.1 C10.2 C11.2 LD1.1 LD2.1 P2.1 P2.2 P3.8 P4.1 P5.1 R5.2 U1.9 U1.24 U1.36 U1.48 U2.2 | length 8369.1
  Top Layer w7: R5.2 660,1490 LD1.1 ; v1(785,1555) 812,1528 LD1.1 ; LD2.1 807,1485 LD1.1 ; 995,800 1030,765 1180,765 1289.99,655.01 ; 995,825 v1(1010,825) ; v1(1343.82,1030) U1.24 ; v1(1485,1395) 1485.79,1394.21 U1.9 v1@1485.79,1220.79 ; U1.36 1643.27,991.73 1660,975 v1(1660,980) ; U1.48 v1(1694.45,1300.55) ; P2.1 P2.2 1609.99,565 C5.2 C4.2 C3.2 C2.2 1289.99,655.01 ; P5.1 2525,405 2585,465 P4.1 2165,825 2120,870 v1(1660,870) 1504.99,870 1289.99,655.01
  Top Layer w10: U2.2 425,771.69 425,745 455,715 815,715 860,670 860,579.76 C7.1 1070,425 905,590 905,710 995,800 995,825 995,860 965,890 810,890 764.99,935.01 C10.2 C11.2 C1.2 642.01,1090.01 LD2.1
  Bottom Layer w7: v1(785,1555) 785,1985 P3.8 ; v1(1010,825) 1010,840 1200,1030 v1@1340,1030 ; v1(1343.82,1030) v1@1340,1030 ; v1(1485,1220) 1510,1245 1610,1245 1665.55,1300.55 v1(1694.45,1300.55) ; v1(1485,1395) 1435,1395 1315,1275 1315,1055 v1@1340,1030 ; v1(1660,870) v1(1660,980)
pads on no net: J2.5 J2.6 U2.4 Y.2 Y.3

## Polygon pours and split planes (outlines as drawn)
GND on Top Layer "Bottom Layer-No Net" (solid, remove dead copper, pour order 2): -360,2240 -375,2225 -375,-210 2935,-210 3005,-280 2990,-265 2990,2295 -250,2295 -285,2260
GND on Bottom Layer "Bottom Layer-No Net" (solid, remove dead copper, pour order 4): -320,2255 -320,-365 -360,-405 -285,-330 3235,-330 3235,2085 3030,2290

## Keep-outs
Keep-Out Layer:
  the board outline again, w10

## Silkscreen, mask and mechanical layers (free items; w line width, h text height)
Top Overlay:
  drawing of 719 lines, arcs and shapes, not listed
  text "GND" at 620,1820 h78.74 r90
  text "GND" at 735,1820 h78.74 r90
  text "3V" at 830,1820 h78.74 r90
  text "RST" at 925,1820 h78.74 r90
  text "PB11" at 1025,1820 h78.74 r90
  text "PB10" at 1125,1820 h78.74 r90
  text "PB1" at 1225,1820 h78.74 r90
  text "PB0" at 1325,1820 h78.74 r90
  text "PA7" at 1425,1820 h78.74 r90
  text "PA6" at 1520,1820 h78.74 r90
  text "PA5" at 1640,1820 h78.74 r90
  text "PA4" at 1740,1820 h78.74 r90
  text "PA3" at 1835,1820 h78.74 r90
  text "PA2" at 1945,1820 h78.74 r90
  text "PA1" at 2040,1820 h78.74 r90
  text "PA0" at 2145,1815 h78.74 r90
  text "PC15" at 2245,1815 h78.74 r90
  text "PC14" at 2340,1815 h78.74 r90
  text "PC13" at 2440,1815 h78.74 r90
  text "VBAT" at 2545,1790 h78.74 r90
  text "ON" at 1000,1470 h60
  text "PC13" at 1000,1240 h60
  text "GND" at 2400,1100 h78.74
  text "SWCLK" at 2325,1000 h78.74
  text "SWDIO" at 2340,900 h78.74
  text "STM32 bluepill" at 1030,800 h118.11
  text "VCC" at 2400,795 h78.74
  text "UNO" at 1230,695 h118.11
  text "BOOT1" at 1775,635 h78.74
  text "VCC" at 1630,560 h78.74 r270
  text "GND" at 2065,460 h78.74 r90
  text "BOOT0" at 1770,350 h78.74
  text "GND" at 2450,170 h78.74 r90
  text "3V" at 2550,170 h78.74 r90
  text "PB12" at 630,165 h78.74 r90
  text "PB13" at 730,165 h78.74 r90
  text "PB14" at 830,165 h78.74 r90
  text "PB15" at 930,165 h78.74 r90
  text "PA8" at 1030,165 h78.74 r90
  text "PA9" at 1130,165 h78.74 r90
  text "PA10" at 1230,165 h78.74 r90
  text "PA11" at 1325,165 h78.74 r90
  text "PA12" at 1430,165 h78.74 r90
  text "PA15" at 1530,165 h78.74 r90
  text "PB3" at 1650,165 h78.74 r90
  text "PB4" at 1750,165 h78.74 r90
  text "PB5" at 1850,165 h78.74 r90
  text "PB6" at 1950,165 h78.74 r90
  text "PB7" at 2050,165 h78.74 r90
  text "PB8" at 2150,165 h78.74 r90
  text "PB9" at 2250,165 h78.74 r90
  text "VIN(5V)" at 2350,165 h78.74 r90
Bottom Overlay:
  drawing of 2799 lines, arcs and shapes, not listed
  text "STM32 Bluepill UNO" at 760,1420 h118.11 r90
  text "Under GNU General Public License V3.0" at 825,1275 h39.37 r90
  text "REV 1.0" at 750,630 h39.37 r90